# Altium PCB Yboard.pcbdoc (part 1 of 2)
Units mil, origin at the board's own origin, x right, y up, seen from the top; angles counter-clockwise.
Board outline 6804.08 x 4580.91 mil, 2 copper layers (Top Layer, Bottom Layer); 74 components, 99 nets, 390 pads, 148 vias.
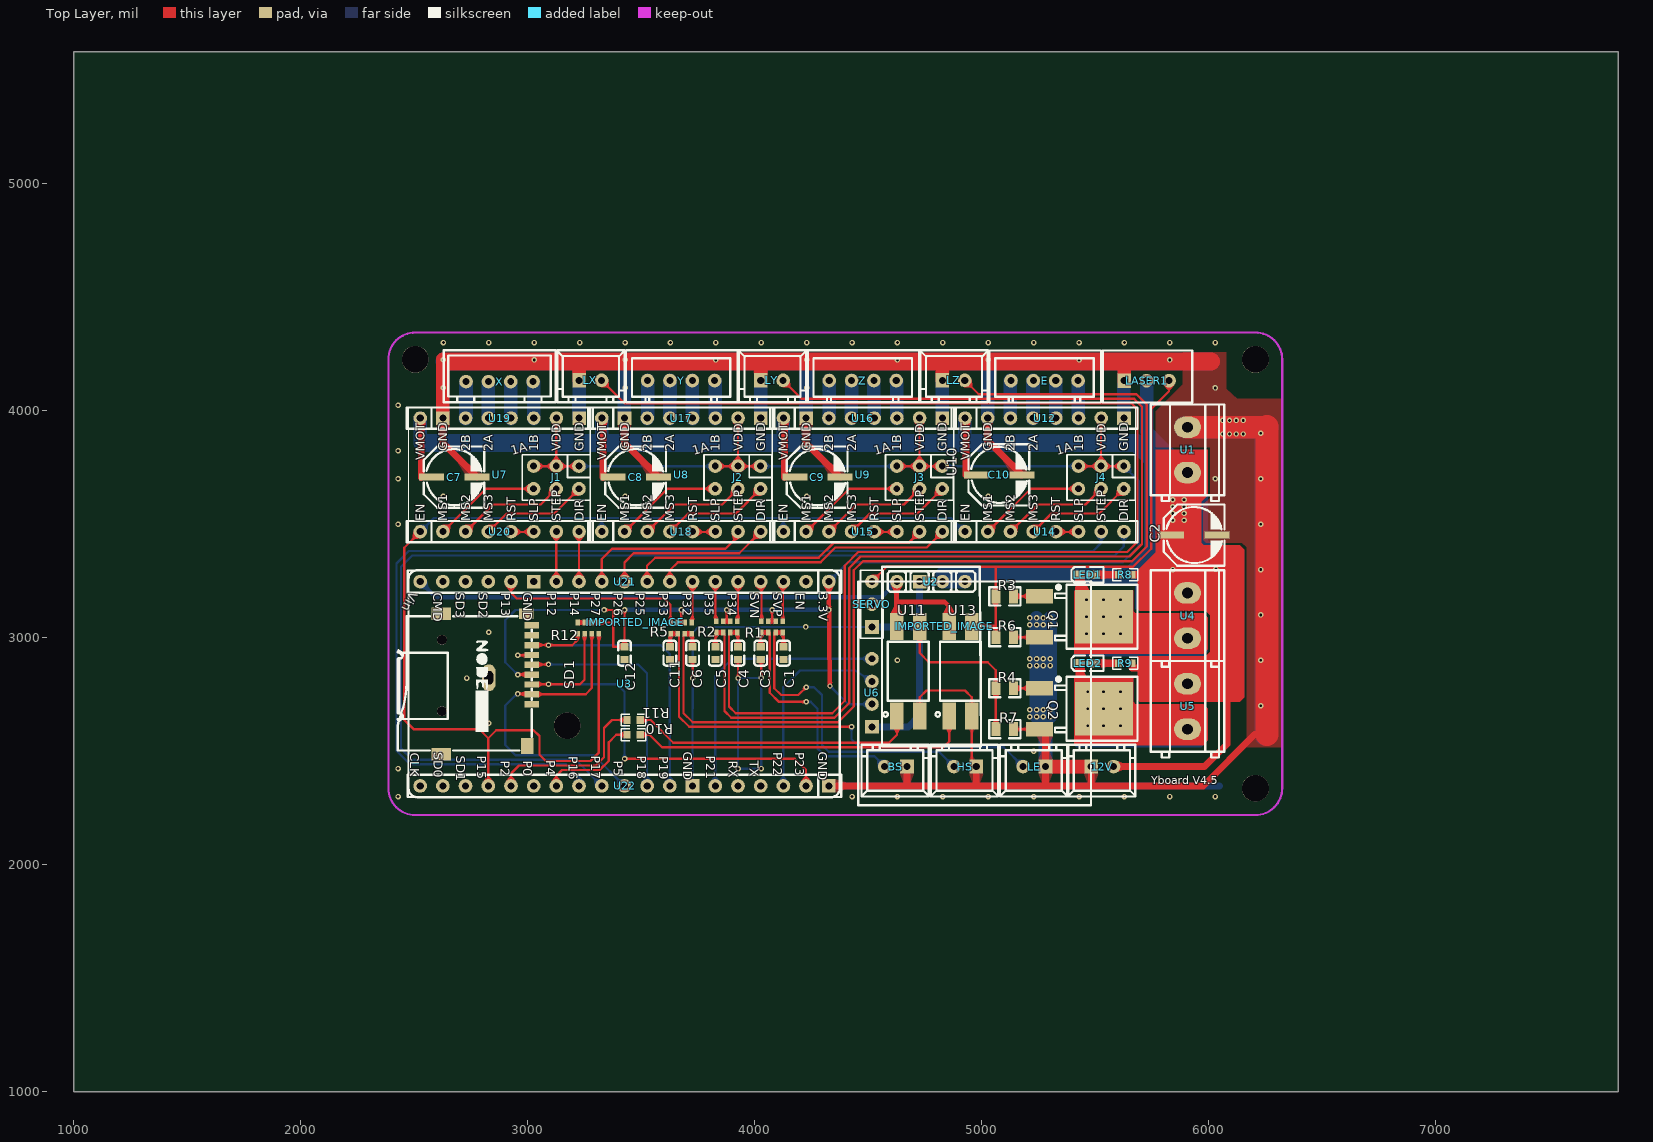
[diagram p0: Top Layer view]
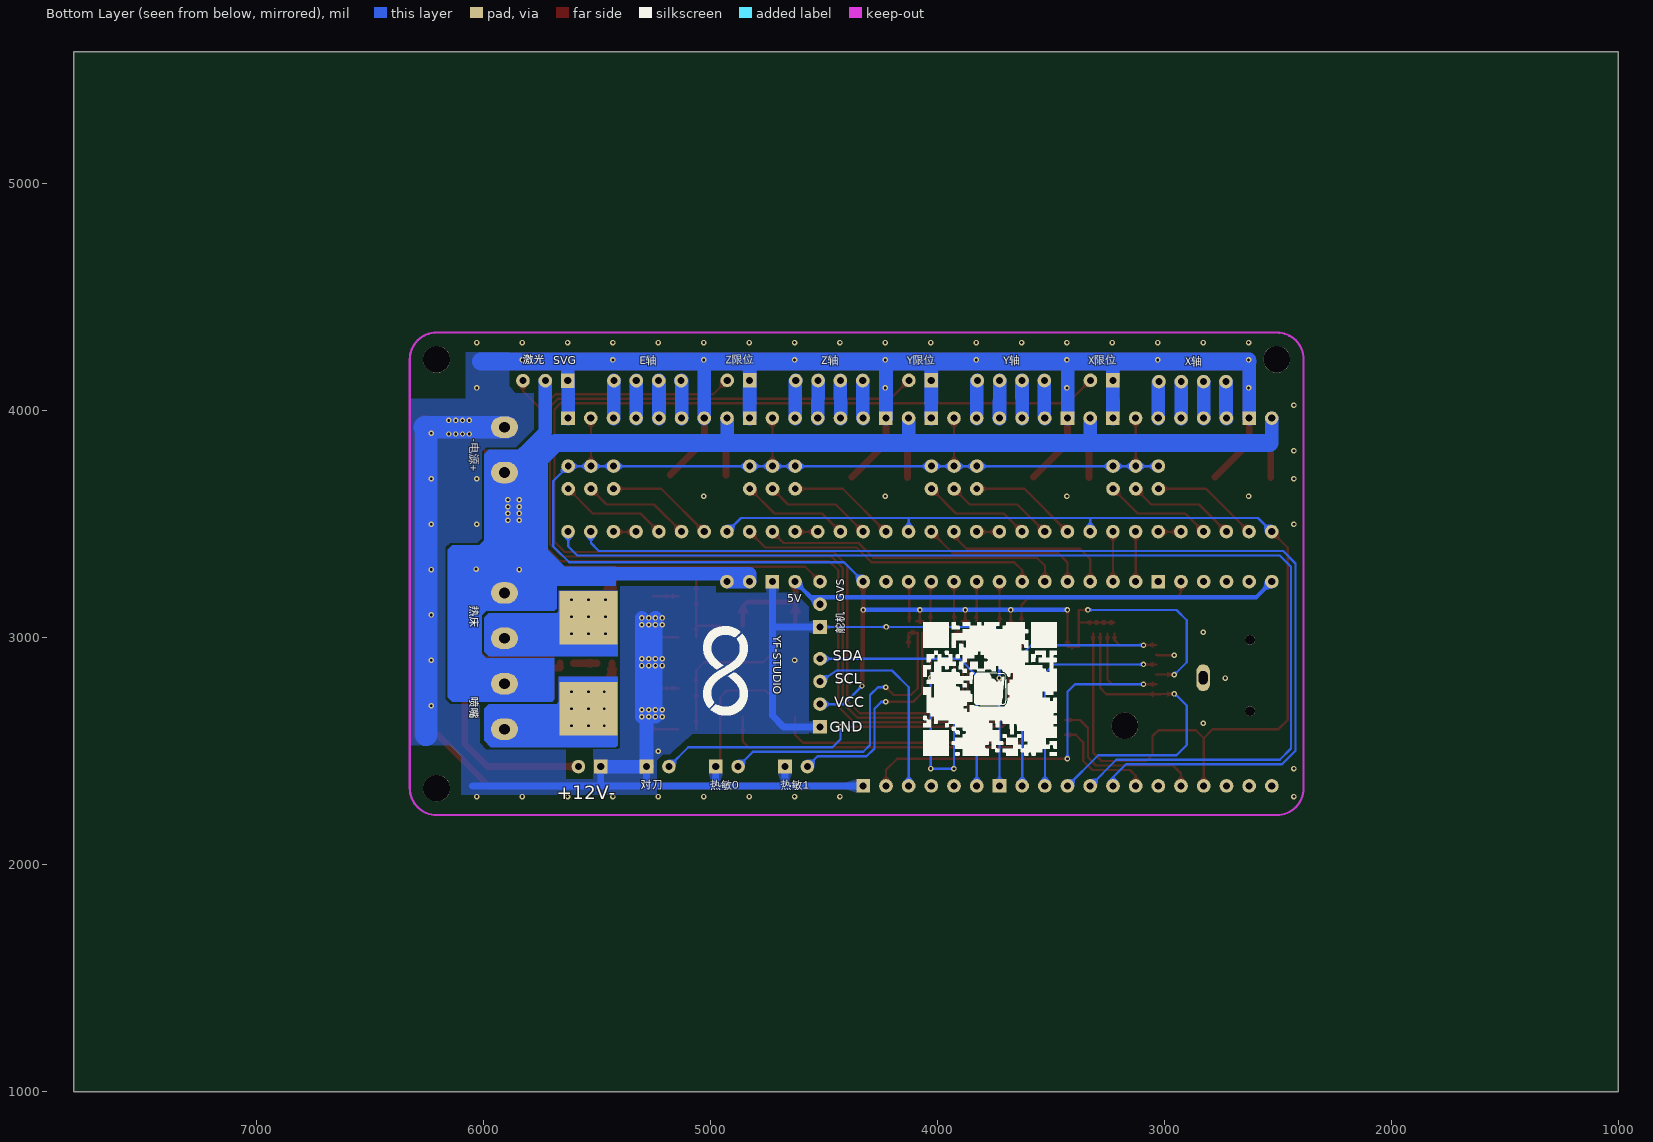
[diagram p1: Bottom Layer view, seen from below]

## Layer stack, top to bottom
Top Layer: signal copper (thickness not stored)
Dielectric: dielectric 12.6, FR-4, Dk 4.8
Bottom Layer: signal copper (thickness not stored)

## Board outline
7804.08,1000 1000,1000 1000,5580.91 7804.08,5580.91

## Components (designator, comment, footprint, x,y, rotation, side; value= is the part's Value field where it differs from the comment)
12V "+12V-" CONN-TH_XH-2A#1 5531.48,2431.81 r180 top
BS "热敏1" CONN-TH_XH-2A#2 4621.48,2431.81 r180 top
C1 "10uF" C0603 4126.43,2931.81 r90 top
C2 "100uF" CAP-D6.3XH7.7 5836.46,3451.81 r180 top
C3 "10uF" C0603 4026.43,2931.81 r90 top
C4 "100nF" C0603 3926.43,2931.81 r90 top
C5 "100nF" C0603 3826.43,2931.81 r90 top
C6 "100nF" C0603 3726.43,2931.81 r90 top
C7 "100uF" CAP-D6.3XH7.7 2576.46,3706.81 r180 top
C8 "100uF" CAP-D6.3XH7.7 3376.46,3706.81 r180 top
C9 "100uF" CAP-D6.3XH7.7 4176.46,3706.81 r180 top
C10 "100uF" CAP-D6.3XH7.7 4976.46,3716.81 r180 top
C11 "100nF" C0603 3626.43,2931.81 r90 top
C12 "100nF" C0603 3426.46,2931.81 r90 top
E "E轴" CONN-TH_4P-P2.50_XH-4A 5276.48,4131.81 r0 top
HS "热敏0" CONN-TH_XH-2A#2 4926.48,2431.81 r180 top
IMPORTED_IMAGE "IMPORTED_IMAGE" IMPORTED_IMAGE 3473.19,3067.67 r0 top
IMPORTED_IMAGE "IMPORTED_IMAGE" IMPORTED_IMAGE 4834.86,3050.02 r0 top
J1 "Header-Male-2.54_2x3" HDR-TH_6P-P2.54-V-R2-C3-S2.54 3125.83,3705.31 r180 top
J2 "Header-Male-2.54_2x3" HDR-TH_6P-P2.54-V-R2-C3-S2.54 3925.83,3705.31 r180 top
J3 "Header-Male-2.54_2x3" HDR-TH_6P-P2.54-V-R2-C3-S2.54 4725.83,3705.31 r180 top
J4 "Header-Male-2.54_2x3" HDR-TH_6P-P2.54-V-R2-C3-S2.54 5525.83,3705.31 r180 top
LASER1 "激光" CONN-TH_XH-3A 5726.48,4131.81 r0 top
LE "对刀" CONN-TH_XH-2A#2 5231.48,2431.81 r180 top
LED1 "LED-Blue(0603)" LED-0603-R 5466.46,3276.81 r0 top
LED2 "LED-Blue(0603)" LED-0603-R 5466.46,2886.81 r0 top
LX "X限位" CONN-TH_XH-2A#2 3275.88,4133.31 r0 top
LY "Y限位" CONN-TH_XH-2A#2 4075.88,4133.31 r0 top
LZ "Z限位" CONN-TH_XH-2A#2 4875.88,4133.31 r0 top
Q1 "RFD16N06LE" TO-252-2_L6.6-W6.1-P4.57-LS9.9-BR-CW 5396.46,3091.81 r180 top
Q2 "RFD16N06LE" TO-252-2_L6.6-W6.1-P4.57-LS9.9-BR-CW 5396.46,2686.81 r180 top
R1 "RESISTOR-ARRAY0603-ARV" 0603-ARV 4076.46,3046.81 r180 top
R2 "RESISTOR-ARRAY0603-ARV" 0603-ARV 3876.46,3046.81 r0 top
R3 "10K" R0805 5101.46,3181.81 r0 top
R4 "10K" R0805 5101.46,2776.81 r0 top
R5 "RESISTOR-ARRAY0603-ARV" 0603-ARV 3676.46,3041.81 r0 top
R6 "100K" R0805 5101.46,3001.81 r180 top
R7 "100K" R0805 5101.46,2596.81 r180 top
R8 "2.7K" R0603 5632.01,3276.81 r0 top
R9 "2.7K" R0603 5632.01,2886.81 r0 top
R10 "10K" R0603 3466.43,2571.81 r180 top
R11 "10K" R0603 3466.46,2636.81 r180 top
R12 "RESISTOR-ARRAY0603-ARV" 0603-ARV 3266.46,3041.81 r0 top
SD1 "TF卡" TF卡带孔 2777.53,2756.81 r180 top
SERVO "舵机" HDR-3X1/2.54 4516.43,3146.81 r90 top
U1 "-电源+" CONN-TH_P5.08_KF127-5.08-2P 5906.43,3826.81 r90 top
U2 "降压" DC_MOUDLE 4926.43,3246.81 r270 top
U3 "NodeMCU-32SLua" AI-THINKER_NODEMCU-32SLUA 3425.83,2796.81 r270 top
U4 "热床" CONN-TH_P5.08_KF127-5.08-2P 5906.46,3096.81 r90 top
U5 "喷嘴" CONN-TH_P5.08_KF127-5.08-2P 5906.46,2696.81 r90 top
U6 "OLED" 0.96寸OLED模块I2C 4456.46,2261.81 r90 top
U7 "4988" ?#1 2876.46,3716.81 r90 top
U8 "4988" ?#1 3676.46,3716.81 r90 top
U9 "4988" ?#1 4476.46,3716.81 r90 top
U10 "4988" ?#2 5276.46,3716.81 r90 top
U11 "PC817X3NIP0F(C )" OPTO-SMD-4_L4.6-W6.5-P2.54-LS10.3-BL 4676.46,2851.81 r0 top
U12 "KH-2.54FH-1X8P-H8.5" HDR-TH_8P-P2.54-V-F#1 5276.46,3966.81 r0 top
U13 "PC817X3NIP0F(C )" OPTO-SMD-4_L4.6-W6.5-P2.54-LS10.3-BL 4906.46,2851.81 r0 top
U14 "KH-2.54FH-1X8P-H8.5" HDR-TH_8P-P2.54-V-F#2 5276.46,3466.81 r0 top
U15 "KH-2.54FH-1X8P-H8.5" HDR-TH_8P-P2.54-V-F#2 4476.46,3466.81 r0 top
U16 "KH-2.54FH-1X8P-H8.5" HDR-TH_8P-P2.54-V-F#2 4476.46,3966.81 r0 top
U17 "KH-2.54FH-1X8P-H8.5" HDR-TH_8P-P2.54-V-F#2 3676.46,3966.81 r0 top
U18 "KH-2.54FH-1X8P-H8.5" HDR-TH_8P-P2.54-V-F#2 3676.46,3466.81 r0 top
U19 "KH-2.54FH-1X8P-H8.5" HDR-TH_8P-P2.54-V-F#2 2876.46,3966.81 r0 top
U20 "KH-2.54FH-1X8P-H8.5" HDR-TH_8P-P2.54-V-F#2 2876.46,3466.81 r0 top
U21 "KH-2.54FH-1X19P-H8.5" HDR-TH_19P-P2.54-V-F 3426.46,3246.81 r180 top
U22 "KH-2.54FH-1X19P-H8.5" HDR-TH_19P-P2.54-V-F 3426.46,2346.81 r180 top
X "X轴" CONN-TH_XH-4A 2875.87,4127.51 r0 top
Y "Y轴" CONN-TH_4P-P2.50_XH-4A 3675.88,4132.31 r0 top
Z "Z轴" CONN-TH_4P-P2.50_XH-4A 4475.88,4132.31 r0 top
? "" ?#3 4351.85,4653.49 r0 top
? "" ?#3 6759.27,3288.19 r0 top
? "" ?#3 4687.21,2057.53 r0 top
? "" ?#3 2014.25,3416.32 r0 top

## Footprints (in the part's own frame and the unit in brackets; to place one, negate y for a bottom-side part, rotate by r counter-clockwise, add the part's x,y. Pads: shape width x height; smd on the part's side, far side on the other; paste and mask are expansions set on the pad)
0.96寸OLED模块I2C [mil]
  rect 60x60 hole 30: 1(345,-60)
  round 60 hole 30: 2(445,-60) 3(545,-60) 4(645,-60)
  silkscreen extent 0,-1027 987,0
0603-ARV [mil]
  rect 19.7x25.6 smd: 1(-47,-25) 2(-16,-25) 3(16,-25) 4(47,-25) 5(47,25) 6(16,25) 7(-16,25) 8(-47,25)
AI-THINKER_NODEMCU-32SLUA [mil]
  round 60 hole 30: 1(-450,-900) 2(-450,-800) 3(-450,-700) 4(-450,-600) 5(-450,-500) 7(-450,-300) 8(-450,-200) 9(-450,-100) 10(-450,0) 11(-450,100) 12(-450,200) 13(-450,300) 14(-450,400) 15(-450,500) 16(-450,600) 17(-450,700) 18(-450,800) 19(-450,900) 20(450,-900) 21(450,-800) 22(450,-700) 23(450,-600) 24(450,-500) 25(450,-400) 26(450,-300) 27(450,-200) 28(450,-100) 29(450,0) 30(450,100) 31(450,200) 33(450,400) 34(450,500) 35(450,600) 36(450,700) 37(450,800)
  rect 60x60 hole 30: 6(-450,-400) 32(450,300) 38(450,900)
  silkscreen extent -500,-999 500,949
C0603 [mm]
  rect 0.8x0.9 smd: 1(-0.7,0) 2(0.7,0)
  silkscreen extent -1.41,-0.71 1.39,0.72
CAP-D6.3XH7.7 [mm]
  rect 2.8x0.8 smd: 1(0,0) 2(-5.08,0)
  silkscreen extent -5.91,-3.43 0.89,3.43
CONN-TH_4P-P2.50_XH-4A [mil]
  round 60 hole 31.5: 1(-147.65,0) 2(-49.21,0) 3(49.21,0) 4(147.65,0)
  silkscreen extent -243,-96 249,133
CONN-TH_P5.08_KF127-5.08-2P [mm]
  oval 2.4x3 hole 1.2: 1(-2.54,0) 2(2.54,0)
  silkscreen extent -5.71,-4.1 5.08,4.1
CONN-TH_XH-2A#1 [mil]
  round 60 hole 31.5: 1(-49.25,0)
  rect 60x62.99 hole 31.5: 2(49.25,0)
  silkscreen extent -145,-96 151,132
CONN-TH_XH-2A#2 [mil]
  rect 60x62.99 hole 31.5: 1(-49.25,0)
  round 60 hole 31.5: 2(49.25,0)
  silkscreen extent -145,-96 151,132
CONN-TH_XH-3A [mil]
  rect 60x62.99 hole 31.5: 1(-98.45,0)
  round 60 hole 31.5: 2(0.05,0) 3(98.45,0)
  silkscreen extent -194,-96 201,133
CONN-TH_XH-4A [mil]
  round 60 hole 30: 1(-147.64,0) 2(-49.21,0) 3(49.21,0) 4(147.64,0)
  silkscreen extent -246,-91 246,138
DC_MOUDLE [mil]
  round 60 hole 31.5: 1(0,0) 2(0,-100) 4(0,-300)
  rect 60x60 hole 31.5: 3(0,-200)
  silkscreen extent -65,-365 725,70
HDR-3X1/2.54 [mil]
  rect 60x60 hole 31.5: 1(-100,0)
  round 60 hole 31.5: 2(0,0) 3(100,0)
  silkscreen extent -150,-50 150,50
HDR-TH_6P-P2.54-V-R2-C3-S2.54 [mil]
  round 60 hole 30: 1(-100,-50) 2(-100,50) 3(0,-50) 4(0,50) 5(100,-50) 6(100,50)
  silkscreen extent -150,-100 150,100
HDR-TH_8P-P2.54-V-F#1 [mil]
  round 60 hole 31.5: 1(-350,0) 2(-250,0) 3(-150,0) 4(-50,0) 5(50,0) 6(150,0) 7(250,0)
  rect 60x60 hole 31.5: 8(350,0)
  silkscreen extent -409,-47 409,47
HDR-TH_8P-P2.54-V-F#2 [mil]
  round 60 hole 31.5: 1(-350,0) 2(-250,0) 3(-150,0) 4(-50,0) 5(50,0) 6(150,0) 7(250,0) 8(350,0)
  silkscreen extent -409,-47 409,47
HDR-TH_19P-P2.54-V-F [mil]
  round 60 hole 31.5: 1(-900,0) 2(-800,0) 3(-700,0) 4(-600,0) 5(-500,0) 6(-400,0) 7(-300,0) 8(-200,0) 9(-100,0) 10(0,0) 11(100,0) 12(200,0) 13(300,0) 14(400,0) 15(500,0) 16(600,0) 17(700,0) 18(800,0) 19(900,0)
  silkscreen extent -955,-49 955,49
IMPORTED_IMAGE [mil]
LED-0603-R [mil]
  rect 43x39 smd: 1(33.5,0) 2(-33.5,0)
  silkscreen extent -72,-34 70,34
OPTO-SMD-4_L4.6-W6.5-P2.54-LS10.3-BL [mm]
  rect 1.5x3 smd: 1(-1.27,-5) 2(1.27,-5) 3(1.27,5) 4(-1.27,5)
  silkscreen extent -2.79,-5.08 2.3,3.3
R0603 [mil]
  rect 31.75x34.02 smd: 1(-29.65,0) 2(29.65,0)
  silkscreen extent -55,-26 55,26
R0805 [mm]
  rect 1x1.55 smd: 1(-1,0) 2(1,0)
  silkscreen extent -1.75,-1.02 1.75,1.02
TF卡带孔 [mil]
  rect 62.99x27.6 smd: 1(-240,50) 2(-240,6) 3(-240,-37) 4(-240,-80) 5(-240,-124) 6(-240,-167) 7(-240,-210) 8(-240,-254) 9(-240,-297)
  rect 62.99x47.24 smd: 10(-216,-348.05)
  rect 86.6x55.1 smd: 11(158,-348.05) 12(158,269.95)
  rect 55.1x70.9 smd: 13(-219.95,234.95)
  round 43.31 hole 43.31 unplated: ""(155.85,81.08) ""(155.85,-233.88)
  silkscreen extent -240,-337 351,254
TO-252-2_L6.6-W6.1-P4.57-LS9.9-BR-CW [mm]
  rect 3x1.6 smd: 1(3.617,-2.285) 3(3.611,2.285)
  rect 6.5x6 smd: 2(-3.617,0)
  silkscreen extent -7.37,-3.57 1.88,3.57
?#1 [mil]
  round 60 hole 30: 1(-250,350) 2(-250,250) 3(-250,150) 4(-250,50) 5(-250,-50) 6(-250,-150) 7(-250,-250) 8(-250,-350) 10(250,-250) 11(250,-150) 12(250,-50) 13(250,50) 14(250,150) 16(250,350)
  rect 60x60 hole 30: 9(250,-350) 15(250,250)
  silkscreen extent -300,-400 300,400
?#2 [mil]
  round 60 hole 30: 1(-250,350) 2(-250,250) 3(-250,150) 4(-250,50) 5(-250,-50) 6(-250,-150) 7(-250,-250) 8(-250,-350) 9(250,-350) 10(250,-250) 11(250,-150) 12(250,-50) 13(250,50) 14(250,150) 15(250,250) 16(250,350)
  silkscreen extent -300,-400 300,400
?#3 [mil]

## Free pads (board coordinates)
  rect 255.91x236.22 smd far side: 2(5536.46,2686.81) 2(5536.46,3086.81)
  oval 59.05x118.11 hole 39.37 slot 59.05 at 90 deg: 3(2828.67,2823.1)
  round 118.11 hole 118.11 unplated: ""(2504.57,4225.94) ""(3173.86,2611.77) ""(6205.36,2336.18) ""(6205.36,4225.94)

## Via types
v1: diameter 24, hole 12, Top Layer to Bottom Layer, 81 vias
v2: diameter 24.02, hole 12.01, Top Layer to Bottom Layer, 67 vias

## Nets (pads, with @x,y where several pads share a name; then routed paths per layer and width w, separated by ;. In a path a pad name is that pad's centre, name@x,y a point inside that pad or via, vN(x,y) a via of type N, cw(c..) or ccw(c..) an arc to the next point about the centre after c; other vN are vias at no path point)
3V3: C12.2 J1.1 J1.3 J1.5 J2.1 J2.3 J2.5 J3.1 J3.3 J3.5 J4.1 J4.3 J4.5 R1.2 R1.3 R2.6 R2.7 R5.6 R5.7 R12.5 R12.6 R12.7 R12.8 SD1.4 U3.19 U6.2 U7.10 U8.10 U9.10 U10.10 U12.7 U16.7 U17.7 U19.7 U21.1 | length 9404.7
  Top Layer w10: v1@2956.43,2836.81 2957.43,2837.81 SD1.4@3034.83,2837.81 ; J1.5@3025.83,3755.31 J1.1@3225.83,3755.31 ; J1.3@3125.83,3755.31 U19.7@3125.83,3965.31 ; R12.8@3219.43,3066.81 3313.43,3066.81 3376.43,3066.81 3376.43,2959.41 ; v1@3336.43,3121.81 3376.43,3121.81 3376.43,2959.41 ; v1@3426.43,3121.81 C12.2@3426.43,2959.41 ; R5.7@3660.43,3066.81 R5.6@3692.43,3066.81 ; 3674.91,3066.81 3676.46,3068.36 v1(3676.46,3121.81) ; J2.5@3825.83,3755.31 J2.1@4025.83,3755.31 ; R2.7@3860.43,3071.81 R2.6@3892.43,3071.81 ; 3874.91,3071.81 3876.46,3073.36 v1(3876.46,3121.81) ; J2.3@3925.83,3755.31 U17.7@3925.83,3965.31 ; R1.3@4060.43,3071.81 R1.2@4092.43,3071.81 ; v1(4076.43,3121.81) 4076.93,3071.81 ; J3.5@4625.83,3755.31 J3.1@4825.83,3755.31 ; J3.3@4725.83,3755.31 U16.7@4725.83,3965.31 ; J4.5@5425.83,3755.31 J4.1@5625.83,3755.31 ; J4.3@5525.83,3755.31 U10.10@5525.83,3965.31 ; 3376.43,2959.41 C12.2@3426.43,2959.41 ; 3376.43,2959.41 C12.2@3426.43,2959.41
  Top Layer w20: U3.19@4325.83,3246.81 v1(4331.46,2786.81)
  Bottom Layer w10: v1@2956.43,2836.81 2901.43,2891.81 2901.43,3076.81 2946.43,3121.81 v1@3336.43,3121.81 ; J1.5@3025.83,3755.31 J4.1@5625.83,3755.31 5691.43,3689.71 5691.43,3401.81 5621.43,3331.81 4410.83,3331.81 U3.19@4325.83,3246.81 ; v1@4331.43,2786.81 4411.43,2706.81 U6.2@4516.43,2706.81
  Bottom Layer w20: v1(3426.46,3121.81) v1(4325.83,3121.81)
  other v1: 2956.46,2836.81 3336.46,3121.81
+5V: SERVO.2 U2.4 U3.1 U11.4 U13.4 U21.19 | length 2920.4
  Top Layer w20: U11.4@4626.43,3051.81 4621.43,3241.81 U2.4@4626.43,3246.81 4626.43,3156.81 4836.43,3156.81 4856.43,3136.81 U13.4@4856.43,3051.81
  Bottom Layer w20: U3.1@2525.83,3246.81 2595.83,3176.81 4556.43,3176.81 U2.4@4626.43,3246.81 4526.42,3146.81 SERVO.2@4516.46,3146.81
+12V: 12V.1 C2.1 C7.1 C8.1 C9.1 C10.1 LASER1.2 R8.2 R9.2 U1.1 U2.1 U2.2 U4.2 U5.2 U7.16 U8.16 U9.16 U10.16 U12.1 U16.1 U17.1 U19.1 | length 10952.5
  Top Layer w30: U19.1@2525.83,3965.31 2530.93,3960.21 C7.1@2530.93,3705.31 ; U17.1@3325.83,3965.31 3330.93,3960.21 C8.1@3330.93,3705.31 ; U16.1@4125.83,3965.31 4130.93,3960.21 C9.1@4130.93,3705.31 ; U10.16@4925.83,3965.31 4930.93,3960.21 C10.1@4930.93,3715.31 ; 12V.1@5580.73,2431.81 5981.43,2431.81 6081.43,2531.81 6081.43,3196.81 U4.2@5906.43,3196.81
  Top Layer w31.5: R9.2@5661.63,2886.81 5661.63,2866.81 5884.03,2866.81 5906.43,2844.41 ; R8.2@5661.63,3276.81 5874.03,3276.81 5906.43,3244.41
  Top Layer w100: 5906.43,2844.41 6074.03,2844.41 6074.03,3196.81 U4.2@5906.43,3196.81
  Bottom Layer w60: 2525.83,3861.81 U19.1@2525.83,3965.31 ; 3325.83,3861.81 U17.1@3325.83,3965.31 ; 4125.83,3861.81 U16.1@4125.83,3965.31 ; 4925.83,3861.81 U10.16@4925.83,3965.31 ; U2.1@4926.43,3246.81 U2.2@4826.43,3246.81 4826.43,3281.81 5722.33,3281.81 5807.33,3196.81 U4.2@5906.43,3196.81 ; LASER1.2@5726.53,4131.81 5726.53,3906.71 U1.1@5906.43,3726.81
  Bottom Layer w80: 2536.43,3856.81 5681.43,3856.81 5761.43,3776.81 5761.43,3341.81 5906.43,3196.81 U1.1@5906.43,3726.81
  Bottom Layer w100: U5.2@5906.43,2796.81 6081.43,2796.81 6076.43,3191.81 U4.2@5906.43,3196.81
  other v1: 5841.46,3299.8 6031.46,3301.81 5841.46,3516.8 5891.46,3516.81 5841.46,3546.81 5891.46,3546.81 5841.46,3576.8 5891.46,3576.81 5841.46,3606.81 5891.46,3606.81
C1_2: C1.2 HS.2 R1.7 R1.8 | length 1437.2
  Top Layer w10: C1.2@4126.43,2959.37 4126.43,3018.81 4123.43,3021.81 4092.43,3021.81 4086.43,3021.81 4086.43,2776.81 4116.43,2746.81 4191.43,2746.81 v1@4226.43,2781.81
  Bottom Layer w10: v1@4226.43,2781.81 4261.43,2781.81 4296.43,2746.81 4296.43,2526.81 4326.43,2496.81 4812.23,2496.81 HS.2@4877.23,2431.81
  other v1: 4226.46,2781.81
C3_2: BS.2 C3.2 R1.5 R1.6 | length 1113.5
  Top Layer w10: C3.2@4026.43,2959.37 4026.43,3018.81 4029.43,3021.81 4060.43,3021.81 4066.43,3021.81 4066.43,2756.81 4106.43,2716.81 v1@4226.43,2716.81
  Bottom Layer w10: v1@4226.43,2716.81 4246.23,2716.81 4276.43,2686.61 4276.43,2511.81 4311.43,2476.81 4527.23,2476.81 BS.2@4572.23,2431.81 BS.2@4577.23,2431.81
  other v1: 4226.46,2716.81
C4_2: C4.2 LX.2 R2.3 R2.4 | length 5893.7
  Top Layer w10: LX.2@3325.03,4133.31 3426.53,4031.81 5659.93,4031.81 5686.43,4005.31 5686.43,3421.81 5641.43,3376.81 4456.43,3376.81 4396.43,3316.81 4396.43,2721.81 4341.43,2666.81 3916.43,2666.81 3886.43,2696.81 3886.43,3015.81 3892.43,3021.81 3923.43,3021.81 3926.43,3018.81 C4.2@3926.43,2959.37
C5_2: C5.2 LY.2 R2.1 R2.2 | length 5194.5
  Top Layer w10: C5.2@3826.43,2959.37 3826.43,3018.81 3829.43,3021.81 3860.43,3021.81 3866.43,3015.81 3866.43,2676.81 3896.43,2646.81 4351.43,2646.81 4416.43,2711.81 4416.43,3306.81 4466.43,3356.81 5651.43,3356.81 5706.43,3411.81 5706.43,4016.61 5671.23,4051.81 4206.53,4051.81 LY.2@4125.03,4133.31
C6_2: C6.2 LZ.2 R5.3 R5.4 | length 4641.7
  Top Layer w10: C6.2@3726.43,2959.37 3726.43,3013.81 3723.43,3016.81 3692.43,3016.81 3686.43,3010.81 3686.43,2666.81 3726.43,2626.81 4366.43,2626.81 4436.43,2696.81 4436.43,3296.81 4476.43,3336.81 5661.43,3336.81 5726.43,3401.81 5726.43,4026.81 5681.43,4071.81 4986.53,4071.81 LZ.2@4925.03,4133.31
E_1A: E.3 U10.12 U12.5 | length 167.5
  Bottom Layer w60: E.3@5325.69,4131.81 5325.83,4132.31 U10.12@5325.83,3965.31
E_1B: E.4 U10.11 U12.6 | length 168.8
  Bottom Layer w60: E.4@5424.13,4131.81 5425.83,4132.31 U10.11@5425.83,3965.31
E_2A: E.2 U10.13 U12.4 | length 168.5
  Bottom Layer w60: U10.13@5225.83,3965.31 5225.83,4132.31 E.2@5227.27,4131.81
E_2B: E.1 U10.14 U12.3 | length 170
  Bottom Layer w60: U10.14@5125.83,3965.31 5125.83,4132.31 E.1@5128.83,4131.81
E_DIR: U3.28 U10.8 U14.8 U22.11 | length 5038.9
  Bottom Layer w10: U22.11@3326.43,2346.81 3211.63,2461.81 2491.43,2461.81 2441.43,2511.81 2441.43,3311.81 2491.43,3361.81 5586.43,3361.81 5625.83,3401.21 U10.8@5625.83,3465.31
E_LIMIT: R5.8 U3.5 U21.15 | length 852.2
  Top Layer w10: U3.5@2925.83,3246.81 2925.83,3197.41 2951.43,3171.81 3601.43,3171.81 3629.43,3143.81 R5.8@3629.43,3066.81
E_MS1: J4.6 U10.2 U14.2 | length 478.7
  Top Layer w10: U10.2@5025.83,3465.31 5215.83,3655.31 J4.6@5425.83,3655.31
E_MS2: J4.4 U10.3 U14.3 | length 478.7
  Top Layer w10: U10.3@5125.83,3465.31 5247.32,3586.81 5457.32,3586.81 J4.4@5525.83,3655.31
E_MS3: J4.2 U10.4 U14.4 | length 478.7
  Top Layer w10: U10.4@5225.83,3465.31 5307.33,3546.81 5517.33,3546.81 J4.2@5625.83,3655.31
E_SLEEP: U10.5 U10.6 U14.5 U14.6 | length 100
  Top Layer w10: U10.5@5325.83,3465.31 U10.6@5425.83,3465.31
E_STEP: U3.27 U10.7 U14.7 U22.12 | length 4906.4
  Bottom Layer w10: U22.12@3226.43,2346.81 3225.83,2384.79 3168.81,2441.81 2481.43,2441.81 2421.43,2501.81 2421.43,3326.81 2476.43,3381.81 5491.43,3381.81 5525.83,3416.21 U10.7@5525.83,3465.31
GND: 12V.2 BS.1 C1.1 C2.2 C3.1 C4.1 C5.1 C6.1 C7.2 C8.2 C9.2 C10.2 C11.1 C12.1 HS.1 LASER1.1 LE.1 LX.1 LY.1 LZ.1 pad.3 Q1.3 Q2.3 R6.1 R7.1 SD1.6 SERVO.1 U1.2 U2.3 U3.6 U3.32 U3.38 U6.1 U7.9 U7.15 U8.9 U8.15 U9.9 U9.15 U10.9 U10.15 U11.2 U12.2 U12.8 U13.2 U16.2 U16.8 U17.2 U17.8 U19.2 U19.8 U21.14 U22.1 U22.7 | length 25315.2
  Top Layer w10: v1@2956.43,2921.81 3031.83,2921.81 SD1.6@3034.83,2924.81 ; v1@3726.43,2821.81 C6.1@3726.43,2904.21 ; v1@3926.43,2821.81 C4.1@3926.43,2904.21 ; C3.1@4026.43,2904.21 4028.63,2902.01 v2@4028.63,2823.11 ; U11.2@4726.43,2654.91 4726.43,2736.81 4756.43,2766.81 4926.43,2766.81 4956.43,2736.81 4956.43,2654.91 4956.43,2451.11 HS.1@4975.73,2431.81 ; R7.1@5140.83,2596.81 Q2.3@5254.31,2596.84 ; R6.1@5140.83,3001.81 Q1.3@5254.31,3001.84
  Top Layer w30: U19.2@2625.83,3965.31 2625.83,3857.41 C7.2@2776.43,3706.81 ; U17.2@3425.83,3965.31 3425.83,3857.41 C8.2@3576.43,3706.81 ; U16.2@4225.83,3965.31 4225.83,3857.41 C9.2@4376.43,3706.81 ; U3.38@4325.83,2346.81 5975.83,2346.81 6202.43,2572.51 6256.43,2572.41 ; 4670.73,2346.81 BS.1@4670.73,2431.81 ; 4975.73,2346.81 HS.1@4975.73,2431.81 ; U10.15@5025.83,3965.31 5025.83,3867.41 C10.2@5176.43,3716.81 ; Q2.3@5254.31,2596.84 5280.73,2570.41 LE.1@5280.73,2431.81 5280.73,2346.81 ; 5482.23,2346.81 12V.2@5482.23,2431.81
  Top Layer w60: U19.2@2625.83,3965.31 v2@2625.83,4226.81 ; LX.1@3226.63,4133.31 3226.63,4221.81 ; LY.1@4026.63,4133.31 4026.63,4221.81 ; LZ.1@4826.63,4133.31 4826.63,4221.81 ; LE.1@5280.73,2431.81 12V.2@5482.23,2431.81 ; LASER1.1@5627.23,4131.81 5627.83,4226.81
  Top Layer w80: v2@2638.43,4216.81 6008.51,4216.81
  Top Layer w100: U1.2@5906.43,3926.81 6256.43,3926.81 ; 6256.43,2572.4 6256.43,3930.67
  Bottom Layer w10: U3.32@3725.83,2346.81 3726.43,3021.81 3751.43,3046.81 v1(4225.29,3046.81) SERVO.1@4516.43,3046.81 ; v1(3926.46,2421.81) 4027.37,2421.81 v2(4028.67,2423.1) v2(4028.67,2823.1) 4027.38,2821.81 v1(3926.46,2821.81) v1(3926.46,2421.81)
  Bottom Layer w30: U3.38@4325.83,2346.81 6047.83,2346.81 ; U6.1@4516.43,2606.81 4676.43,2606.81 4726.43,2656.81 U2.3@4726.43,3246.81 ; SERVO.1@4516.43,3046.81 4726.43,3046.81 ; BS.1@4670.73,2431.81 4671.43,2346.81 ; HS.1@4975.73,2431.81 4976.43,2346.81 ; LE.1@5280.73,2431.81 5281.43,2346.81 ; 5482.23,2346.81 12V.2@5482.23,2431.81
  Bottom Layer w60: U19.2@2625.83,3965.31 v2@2625.83,4226.81 ; U19.8@3225.83,3965.31 LX.1@3226.63,4133.31 3226.63,4226.81 ; U17.2@3425.83,3965.31 v2@3425.83,4226.81 ; U17.8@4025.83,3965.31 LY.1@4026.63,4133.31 4026.63,4226.81 ; U16.2@4225.83,3965.31 v2@4225.83,4226.81 ; U16.8@4825.83,3965.31 LZ.1@4826.63,4133.31 4826.63,4226.81 ; U10.15@5025.83,3965.31 v2@5025.83,4226.81 ; v1(5241.46,2651.81) v1(5241.46,3086.81) ; v1@5280.73,2651.81 LE.1@5280.73,2431.81 12V.2@5482.23,2431.81 ; v1(5301.46,2651.81) v1(5301.46,3086.81) ; U10.9@5625.83,3965.31 5625.83,4131.81 5627.23,4131.81 5627.23,4221.81
  Bottom Layer w80: v2@2634.49,4216.81 6008.51,4216.81
  Bottom Layer w100: 6251.43,2572.41 6251.43,3926.81 5896.43,3926.81 6256.43,3926.81
  other v1: 5211.46,2651.81 5271.46,2651.81 5211.46,2681.81 5241.46,2681.81 5271.46,2681.81 5301.46,2681.81 3726.46,2821.81 5211.46,2876.81 5241.46,2876.81 5271.46,2876.81 5301.46,2876.81 5211.46,2906.81 5241.46,2906.81 5271.46,2906.81 5301.46,2906.81 2956.46,2921.81 5211.46,3056.81 5241.46,3056.81 5271.46,3056.81 5301.46,3056.81 5211.46,3086.81 5271.46,3086.81 6061.46,3896.81 6091.46,3896.81 6121.46,3896.81 6151.46,3896.81 6061.46,3956.81 6091.46,3956.81 6121.46,3956.81 6151.46,3956.81
  other v2: 2428.67,2299.8 4428.67,2299.8 4628.67,2299.8 4828.67,2299.8 5028.67,2299.8 5228.67,2299.8 5428.67,2299.8 5628.67,2299.8 5828.67,2299.8 6028.67,2299.8 2428.67,2423.1 5228.67,2499.8 2828.67,2623.1 6228.67,2699.8 2731.46,2821.81 2828.67,2823.1 4628.67,2899.8 6228.67,2899.8 2828.67,3023.1 6228.67,3099.8 6228.67,3299.8 2428.67,3499.8 6028.67,3499.8 6228.67,3499.8 2628.67,3623.1 3428.67,3623.1 4228.67,3623.1 5028.67,3623.1 2428.67,3699.8 6028.67,3699.8 6228.67,3699.8 2428.67,3823.1 6228.67,3899.8 2428.67,4023.1 2628.67,4099.8 3428.67,4099.8 4228.67,4099.8 6028.67,4099.8 2628.67,4223.1 3028.67,4223.1 3428.67,4223.1 3828.67,4223.1 4228.67,4223.1 4628.67,4223.1 5028.67,4223.1 5428.67,4223.1 5828.67,4223.1 2628.67,4299.8 2828.67,4299.8 3028.67,4299.8 3228.67,4299.8 3428.67,4299.8 3628.67,4299.8 3828.67,4299.8 4028.67,4299.8 4228.67,4299.8 4428.67,4299.8 4628.67,4299.8 4828.67,4299.8 5028.67,4299.8 5228.67,4299.8 5428.67,4299.8 5628.67,4299.8 5828.67,4299.8 6028.67,4299.8
HEATER: R11.2 U3.24 U22.15 | length 738.6
  Top Layer w10: U3.24@2925.83,2346.81 2925.83,2401.21 2961.43,2436.81 3300.43,2436.81 3336.43,2472.81 3336.43,2601.81 3371.43,2636.81 R11.2@3436.8,2636.81
HEATER_MOSFET: R4.1 R7.2 U11.3 | length 746.4
  Top Layer w10: U11.3@4726.43,3051.81 4726.43,2931.81 4766.43,2891.81 5026.43,2891.81 5062.13,2856.11 R4.1@5062.09,2776.81 R7.2@5062.09,2596.81
HEATER_SENSOR: R1.1 U3.17 U21.3 | length 176
  Top Layer w10: R1.1@4123.43,3071.81 4123.43,3244.41 U3.17@4125.83,3246.81
HOTBED: R10.2 U3.26 U22.13 | length 478
  Top Layer w10: U3.26@3125.83,2346.81 3125.83,2391.41 3151.23,2416.81 3316.43,2416.81 3356.43,2456.81 3356.43,2538.41 3389.83,2571.81 R10.2@3436.73,2571.81
HOTBED_MOSFET: LASER1.3 R3.1 R6.2 SERVO.3 U13.3 | length 2738.3
  Top Layer w10: SERVO.3@4516.43,3246.81 4581.43,3311.81 5062.13,3311.81 R3.1@5062.09,3181.81 5062.13,3151.81 R6.2@5062.09,3001.81 ; U13.3@4956.43,3051.81 5061.43,3051.81 5061.43,3311.81 5666.43,3311.81 5746.43,3391.81 5746.43,4006.81 5824.93,4085.31 LASER1.3@5824.93,4131.81
HOTBED_SENSOR: R1.4 U3.16 U21.4 | length 176.5
  Top Layer w10: U3.16@4025.83,3246.81 4029.43,3243.21 R1.4@4029.43,3071.81
IO0: U3.25 U22.14
LE_2: C11.2 LE.2 R5.1 R5.2 | length 2096.3
  Top Layer w10: C11.2@3626.43,2959.37 3626.43,3013.81 3629.43,3016.81 3660.43,3016.81 3666.43,3010.81 3666.43,2651.81 3711.43,2606.81 v1@4426.43,2606.81
  Bottom Layer w10: v1@4426.43,2606.81 4426.43,2551.81 4461.43,2516.81 5097.23,2516.81 LE.2@5182.23,2431.81
  other v1: 4426.46,2606.81
MISO: R12.1 SD1.7 U3.31 U22.8 | length 1352.9
  Top Layer w10: SD1.7@3034.83,2967.81 3090.43,2967.81 3091.43,2966.81 3196.43,2966.81 3219.43,2989.81 R12.1@3219.43,3016.81
  Bottom Layer w10: v1@3091.43,2966.81 3586.43,2966.81 3625.83,2927.41 U3.31@3625.83,2346.81
  other v1: 3091.46,2966.81
MOSI: R12.2 SD1.3 U3.37 U22.2 | length 1960
  Top Layer w10: SD1.3@3034.83,2794.81 v1(3091.5,2794.81) 3230.63,2794.81 3250.43,2814.71 R12.2@3250.43,3016.81 ; v1(3426.46,2466.81) 3471.43,2466.81 4176.43,2466.81 4225.83,2417.41 U3.37@4225.83,2346.81
  Bottom Layer w10: v1(3091.5,2794.81) 3393.43,2794.81 3426.46,2761.78 v1(3426.46,2466.81)
R3_2: Q1.1 R3.2 | length 113.2
  Top Layer w10: R3.2@5140.83,3181.81 Q1.1@5254.03,3181.81
R4_2: Q2.1 R4.2 | length 113.2
  Top Layer w10: R4.2@5140.83,2776.81 Q2.1@5254.03,2776.81
R8_1: LED1.1 R8.1 | length 102.4
  Top Layer w31.5: LED1.1@5499.93,3276.81 R8.1@5602.33,3276.81
R9_1: LED2.1 R9.1 | length 102.4
  Top Layer w31.5: LED2.1@5499.93,2886.81 R9.1@5602.33,2886.81
R10_1: R10.1 U13.1 | length 1503.4
  Top Layer w10: R10.1@3496.08,2571.81 3536.43,2571.81 3591.43,2516.81 4831.43,2516.81 4856.43,2541.81 U13.1@4856.43,2651.81
R11_1: R11.1 U11.1 | length 1266.2
  Top Layer w10: R11.1@3496.11,2636.81 3541.43,2636.81 3641.43,2536.81 4591.43,2536.81 4626.43,2571.81 U11.1@4626.43,2651.81
RX: U3.34 U22.5
S$83890: 
S$83892: 
S$83894: 
S$83896: 
S$83900: 
S$83902: 
S$83904: 
S$83906: 
S$83908: 
S$83912: 
S$83914: 
S$83916: 
S$83918: 
S$83920: 
S$83922: 
S$83924: 
S$83926: 
S$83928: 
S$83930: 
S$83932: 
S$83934: 
SCK: SD1.5 U3.30 U22.9 | length 1002.9
  Top Layer w10: SD1.5@3034.83,2881.81 v1@3091.43,2881.81
  Bottom Layer w10: v1@3091.43,2881.81 3486.43,2881.81 3525.83,2842.41 U3.30@3525.83,2346.81
  other v1: 3091.46,2881.81
SCL: U3.36 U6.3 U22.3 | length 869.6
  Bottom Layer w10: U3.36@4125.83,2346.81 4125.83,2781.21 4199.33,2854.71 4442.43,2854.71 U6.3@4516.43,2806.81
SD_CS: R12.3 SD1.2 U3.29 U22.10 | length 1442.8
  Top Layer w10: v1@2956.43,2751.81 SD1.2@3034.83,2751.81 ; SD1.2@3017.53,2750.81 3255.53,2750.81 3282.43,2777.81 R12.3@3282.43,3016.81
  Bottom Layer w10: v1@2956.43,2751.81 2952.13,2751.81 2901.43,2701.11 2901.43,2526.81 2946.43,2481.81 3290.83,2481.81 U3.29@3425.83,2346.81
  other v1: 2956.46,2751.81
SDA: U3.33 U6.4 U22.6 | length 1206.3
  Bottom Layer w10: U3.33@3825.83,2346.81 3825.83,2831.21 3901.43,2906.81 U6.4@4516.43,2906.81
ST_EN: R12.4 U3.23 U7.1 U8.1 U9.1 U10.1 U14.1 U15.1 U18.1 U20.1 U22.16 | length 5521.3
  Top Layer w10: U20.1@2525.83,3465.31 2456.43,3395.91 2456.43,2636.81 2496.43,2596.81 2786.43,2596.81 2826.43,2556.81 U22.16@2826.43,2346.81 ; U3.23@2825.83,2346.81 2825.83,2556.21 2861.43,2591.81 3025.83,2591.81 3051.43,2566.21 3051.43,2484.31 3078.93,2456.81 3276.43,2456.81 3313.43,2493.81 R12.4@3313.43,3016.81
  Bottom Layer w10: U20.1@2525.83,3465.31 2587.33,3526.81 3325.83,3526.81 ; U10.1@4925.83,3465.31 4864.33,3526.81 4125.83,3526.81 ; 3325.83,3526.81 3325.83,3465.31 3325.83,3526.81 ; 3325.83,3526.81 4125.83,3526.81 ; 4125.83,3526.81 4125.83,3465.31 4125.83,3526.81
TX: U3.35 U22.4
U4_1: LED1.2 pad.2@5536.46,3086.81 Q1.2 U4.1 | length 1052.4
  Top Layer w31.5: LED1.2@5432.93,3276.81 5432.93,3197.71 Q1.2@5538.83,3091.81
  Top Layer w100: Q1.2@5538.83,3091.81 5536.43,3091.81 5631.43,2996.81 U4.1@5906.43,2996.81
  Bottom Layer w100: pad.2@5538.83,3091.81 5536.43,3091.81 5631.43,2996.81 U4.1@5906.43,2996.81
  other v1: 5461.46,3016.81 5536.46,3016.81 5611.46,3016.81 5461.46,3091.81 5536.46,3091.81 5611.46,3091.81 5461.46,3166.81 5536.46,3166.81 5611.46,3166.81
U5_1: LED2.2 pad.2@5536.46,2686.81 Q2.2 U5.1 | length 1053.6
  Top Layer w31.5: LED2.2@5432.93,2886.81 5432.93,2792.71 Q2.2@5538.83,2686.81
  Top Layer w100: Q2.2@5538.83,2686.81 5628.83,2596.81 U5.1@5906.43,2596.81
  Bottom Layer w100: pad.2@5538.83,2686.81 5628.83,2596.81 U5.1@5906.43,2596.81
  other v1: 5466.46,2611.81 5536.46,2611.81 5611.46,2611.81 5466.46,2686.81 5536.46,2686.81 5611.46,2686.81 5466.46,2761.81 5536.46,2761.81 5611.46,2761.81
X_1A: U7.12 U19.5 X.3 | length 162.2
  Bottom Layer w60: X.3@2925.03,4127.51 U19.5@2925.83,3965.31
X_1B: U7.11 U19.6 X.4 | length 163.2
  Bottom Layer w60: X.4@3023.5,4127.51 3025.83,4125.16 U19.6@3025.83,3965.31
X_2A: U7.13 U19.4 X.2 | length 162.2
  Bottom Layer w60: U19.4@2825.83,3965.31 X.2@2826.63,4127.51
X_2B: U7.14 U19.3 X.1 | length 163.2
  Bottom Layer w60: U19.3@2725.83,3965.31 2728.19,3967.68 X.1@2728.23,4127.51
X_DIR: U3.8 U7.8 U20.8 U21.12 | length 218.5
  Top Layer w10: U3.8@3225.83,3246.81 U20.8@3225.83,3465.31
X_LIMIT: R2.5 U3.15 U21.5 | length 176
  Top Layer w10: R2.5@3923.43,3071.81 3925.83,3074.21 U3.15@3925.83,3246.81
X_MS1: J1.6 U7.2 U20.2 | length 478.7
  Top Layer w10: U20.2@2625.83,3465.31 2815.83,3655.31 J1.6@3025.83,3655.31
X_MS2: J1.4 U7.3 U20.3 | length 478.7
  Top Layer w10: U20.3@2725.83,3465.31 2847.33,3586.81 3057.33,3586.81 J1.4@3125.83,3655.31
X_MS3: J1.2 U7.4 U20.4 | length 478.7
  Top Layer w10: U20.4@2825.83,3465.31 2907.33,3546.81 3117.33,3546.81 J1.2@3225.83,3655.31
X_SLEEP: U7.5 U7.6 U20.5 U20.6 | length 100
  Top Layer w10: U20.5@2925.83,3465.31 U20.6@3025.83,3465.31
X_STEP: U3.7 U7.7 U20.7 U21.13 | length 218.5
  Top Layer w10: U3.7@3125.83,3246.81 U20.7@3125.83,3465.31
Y_1A: U8.12 U17.5 Y.3 | length 167
  Bottom Layer w60: Y.3@3725.09,4132.31 U17.5@3725.83,3965.31
Y_1B: U8.11 U17.6 Y.4 | length 168
  Bottom Layer w60: Y.4@3823.53,4132.31 3825.83,4130.01 U17.6@3825.83,3965.31
Y_2A: U8.13 U17.4 Y.2 | length 167
  Bottom Layer w60: U17.4@3625.83,3965.31 Y.2@3626.66,4132.31
Y_2B: U8.14 U17.3 Y.1 | length 168
  Bottom Layer w60: U17.3@3525.83,3965.31 3528.23,3967.71 Y.1@3528.23,4132.31
Y_DIR: U3.10 U8.8 U18.8 U21.10 | length 739.9
  Top Layer w10: U3.10@3425.83,3246.81 3425.83,3331.21 3466.43,3371.81 3932.33,3371.81 U18.8@4025.83,3465.31
Y_LIMIT: R2.8 U3.14 U21.6 | length 176.5
  Top Layer w10: U3.14@3825.83,3246.81 3825.83,3075.41 R2.8@3829.43,3071.81
Y_MS1: J2.6 U8.2 U18.2 | length 478.7
  Top Layer w10: U18.2@3425.83,3465.31 3615.83,3655.31 J2.6@3825.83,3655.31
Y_MS2: J2.4 U8.3 U18.3 | length 478.7
  Top Layer w10: U18.3@3525.83,3465.31 3647.33,3586.81 3857.33,3586.81 J2.4@3925.83,3655.31
Y_MS3: J2.2 U8.4 U18.4 | length 478.7
  Top Layer w10: U18.4@3625.83,3465.31 3707.33,3546.81 3917.33,3546.81 J2.2@4025.83,3655.31
Y_RESET: U8.5 U8.6 U18.5 U18.6 | length 100
  Top Layer w10: U18.5@3725.83,3465.31 U18.6@3825.83,3465.31
Y_STEP: U3.9 U8.7 U18.7 U21.11 | length 759.9
  Top Layer w10: U3.9@3325.83,3246.81 3325.83,3346.21 3371.43,3391.81 3871.43,3391.81 3925.83,3446.21 U18.7@3925.83,3465.31
Z_1A: U9.12 U16.5 Z.3 | length 167
  Bottom Layer w60: Z.3@4525.03,4132.31 U16.5@4525.83,3965.31
Z_1B: U9.11 U16.6 Z.4 | length 168
  Bottom Layer w60: Z.4@4623.53,4132.31 4625.83,4129.96 U16.6@4625.83,3965.31
Z_2A: U9.13 U16.4 Z.2 | length 167
  Bottom Layer w60: U16.4@4425.83,3965.31 Z.2@4426.63,4132.31
Z_2B: U9.14 U16.3 Z.1 | length 167.9
  Bottom Layer w60: U16.3@4325.83,3965.31 4328.13,3967.71 Z.1@4328.13,4132.31
Z_DIR: U3.12 U9.8 U15.8 U21.8 | length 1319.4
  Top Layer w10: U3.12@3625.83,3246.81 3625.83,3296.21 3661.43,3331.81 4290.23,3331.81 4355.23,3396.81 4757.33,3396.81 U15.8@4825.83,3465.31
Z_LIMIT: R5.5 U3.13 U21.7 | length 181
  Top Layer w10: R5.5@3723.43,3066.81 3725.83,3069.21 U3.13@3725.83,3246.81
Z_MS1: J3.6 U9.2 U15.2 | length 478.7
  Top Layer w10: U15.2@4225.83,3465.31 4415.83,3655.31 J3.6@4625.83,3655.31
Z_MS2: J3.4 U9.3 U15.3 | length 478.7
  Top Layer w10: U15.3@4325.83,3465.31 4447.33,3586.81 4657.33,3586.81 J3.4@4725.83,3655.31
Z_MS3: J3.2 U9.4 U15.4 | length 478.7
  Top Layer w10: U15.4@4425.83,3465.31 4507.33,3546.81 4717.33,3546.81 J3.2@4825.83,3655.31
Z_SLEEP: U9.5 U9.6 U15.5 U15.6 | length 100
  Top Layer w10: U15.5@4525.83,3465.31 U15.6@4625.83,3465.31
Z_STEP: U3.11 U9.7 U15.7 U21.9 | length 1331.2
  Top Layer w10: U3.11@3525.83,3246.81 3525.83,3316.21 3561.43,3351.81 4281.43,3351.81 4346.43,3416.81 4677.33,3416.81 U15.7@4725.83,3465.31
pads on no net: SD1. SD1.1 SD1.8 SD1.9 SD1.10 SD1.11 SD1.12 SD1.13 U3.2 U3.3 U3.4 U3.18 U3.20 U3.21 U3.22 U21.2 U21.16 U21.17 U21.18 U22.17 U22.18 U22.19

## Polygon pours and split planes (outlines as drawn)
GND on Bottom Layer (solid): 2276.46,4501.81 6306.46,4501.81 6586.46,4221.81 6586.46,2201.81 6466.46,2081.81 2446.46,2081.81 2146.46,2381.81 2076.46,4301.81 2086.46,4301.81
GND on Top Layer (solid): 2366.46,4331.81 6176.46,4331.81 6356.46,4311.81 6386.46,4121.81 6386.46,2201.81 6366.46,2181.81 2496.46,2181.81 2486.46,2191.81 2351.46,2306.81 2306.46,2491.81 2306.46,4041.81 2276.46,4071.81 2276.46,4081.81

## Keep-outs
Keep-Out Layer:
  lines w10: 2386.46,2336.18 ccw(c2504.57,2336.18) 2504.57,2218.07 ; 2386.46,4225.94 cw(c2504.57,4225.94) 2504.57,4344.05 ; 6205.36,2218.07 ccw(c6205.36,2336.18) 6323.47,2336.18 ; 6205.36,4344.05 cw(c6205.36,4225.94) 6323.47,4225.94